# Altium PCB Mechalino_First_Layer.PcbDoc
Units mm, origin at the board's own origin, x right, y up, seen from the top; angles counter-clockwise.
Board outline 120 x 120 mm, 2 copper layers (Top Layer, Bottom Layer); 29 components, 26 nets, 130 pads, 11 vias.
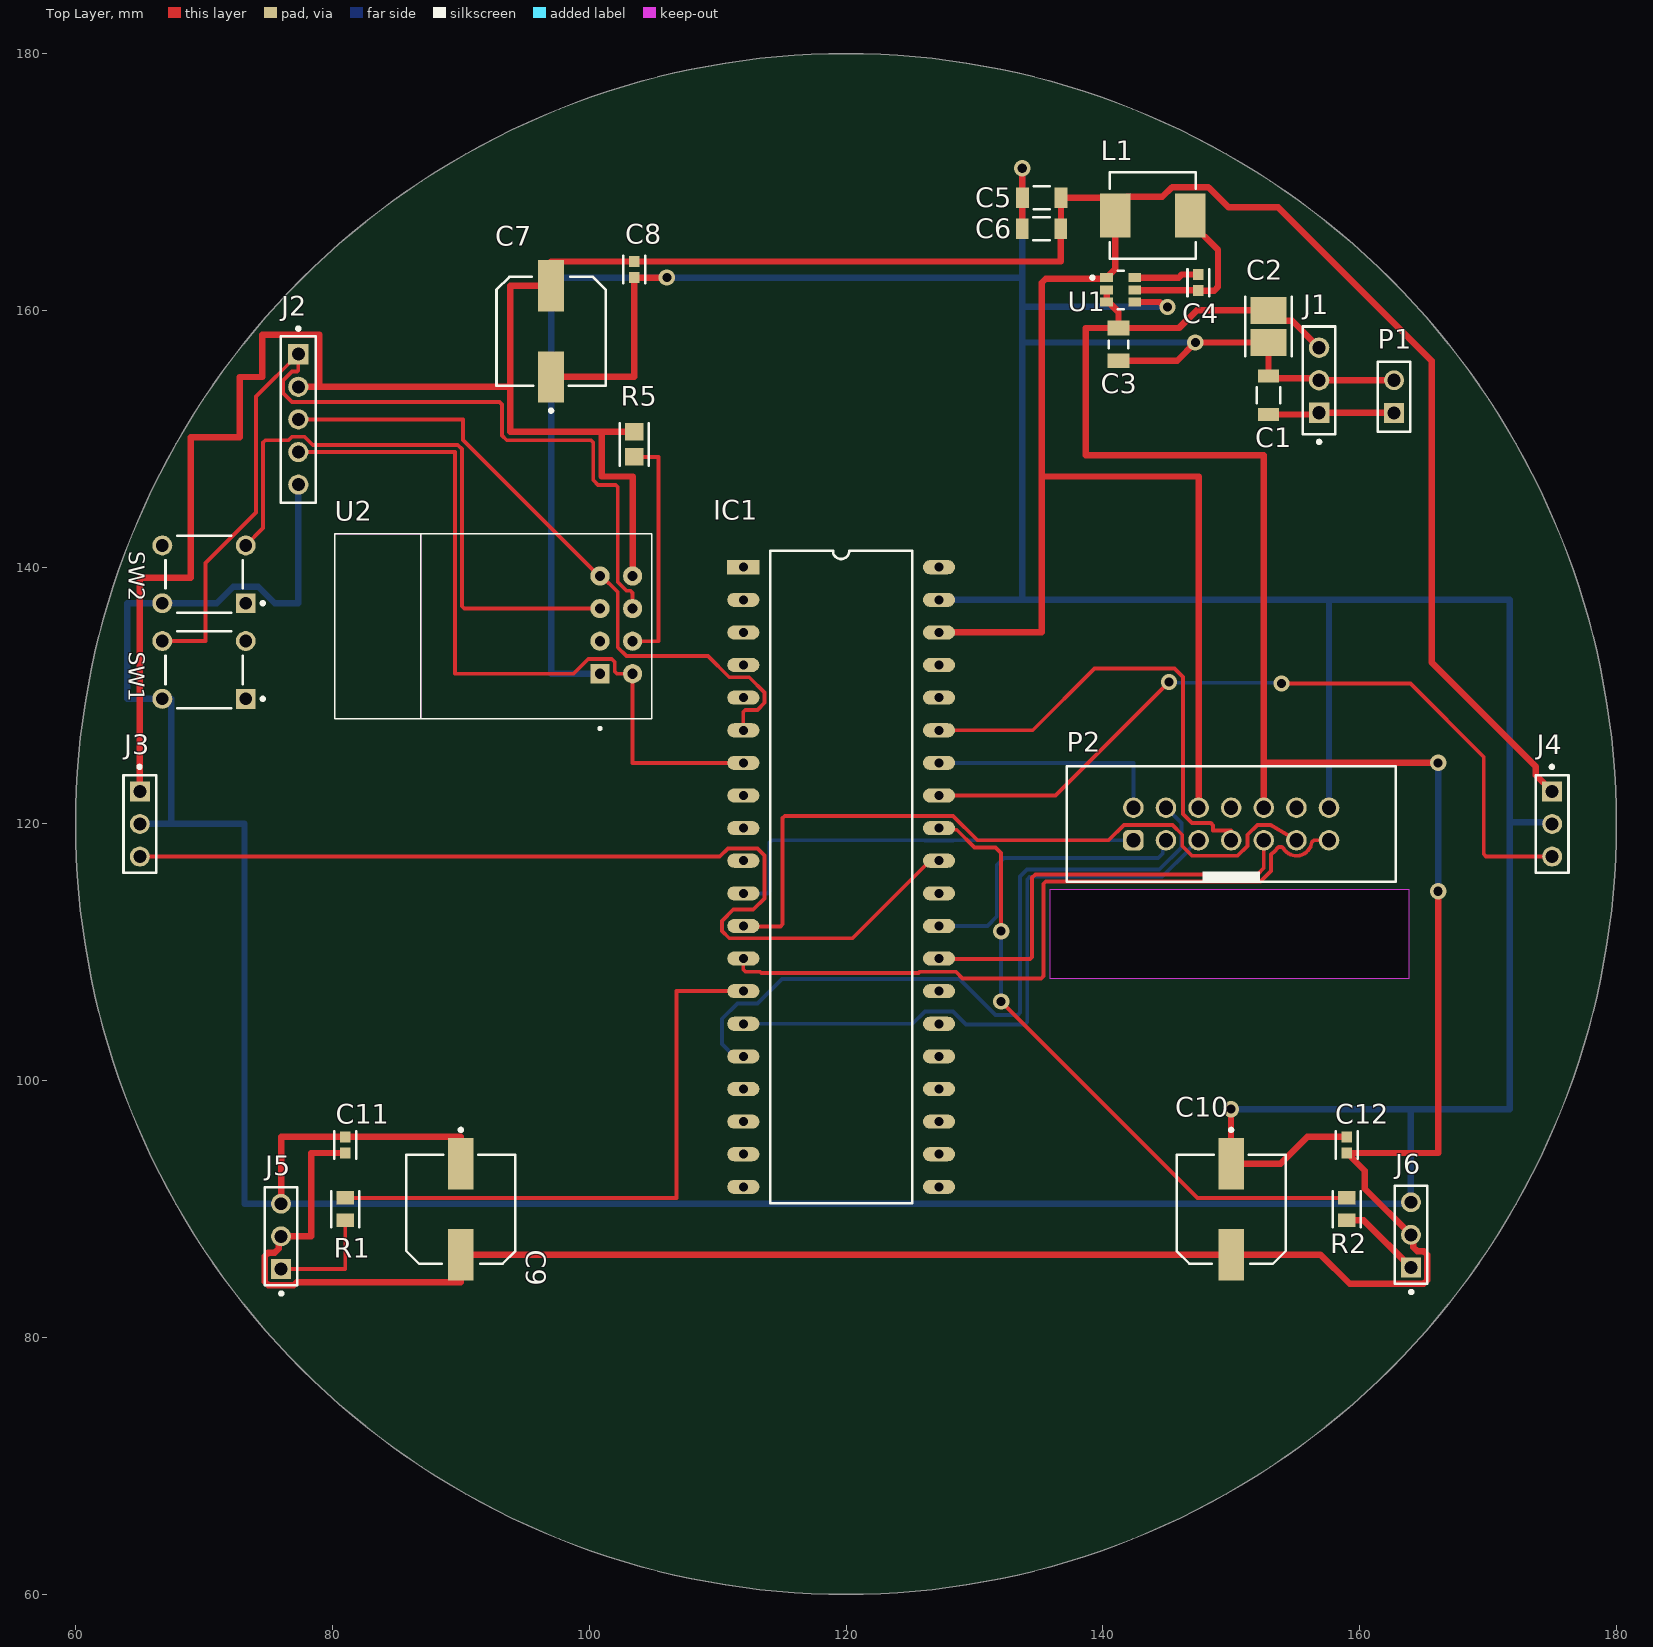
[diagram p0: Top Layer view]
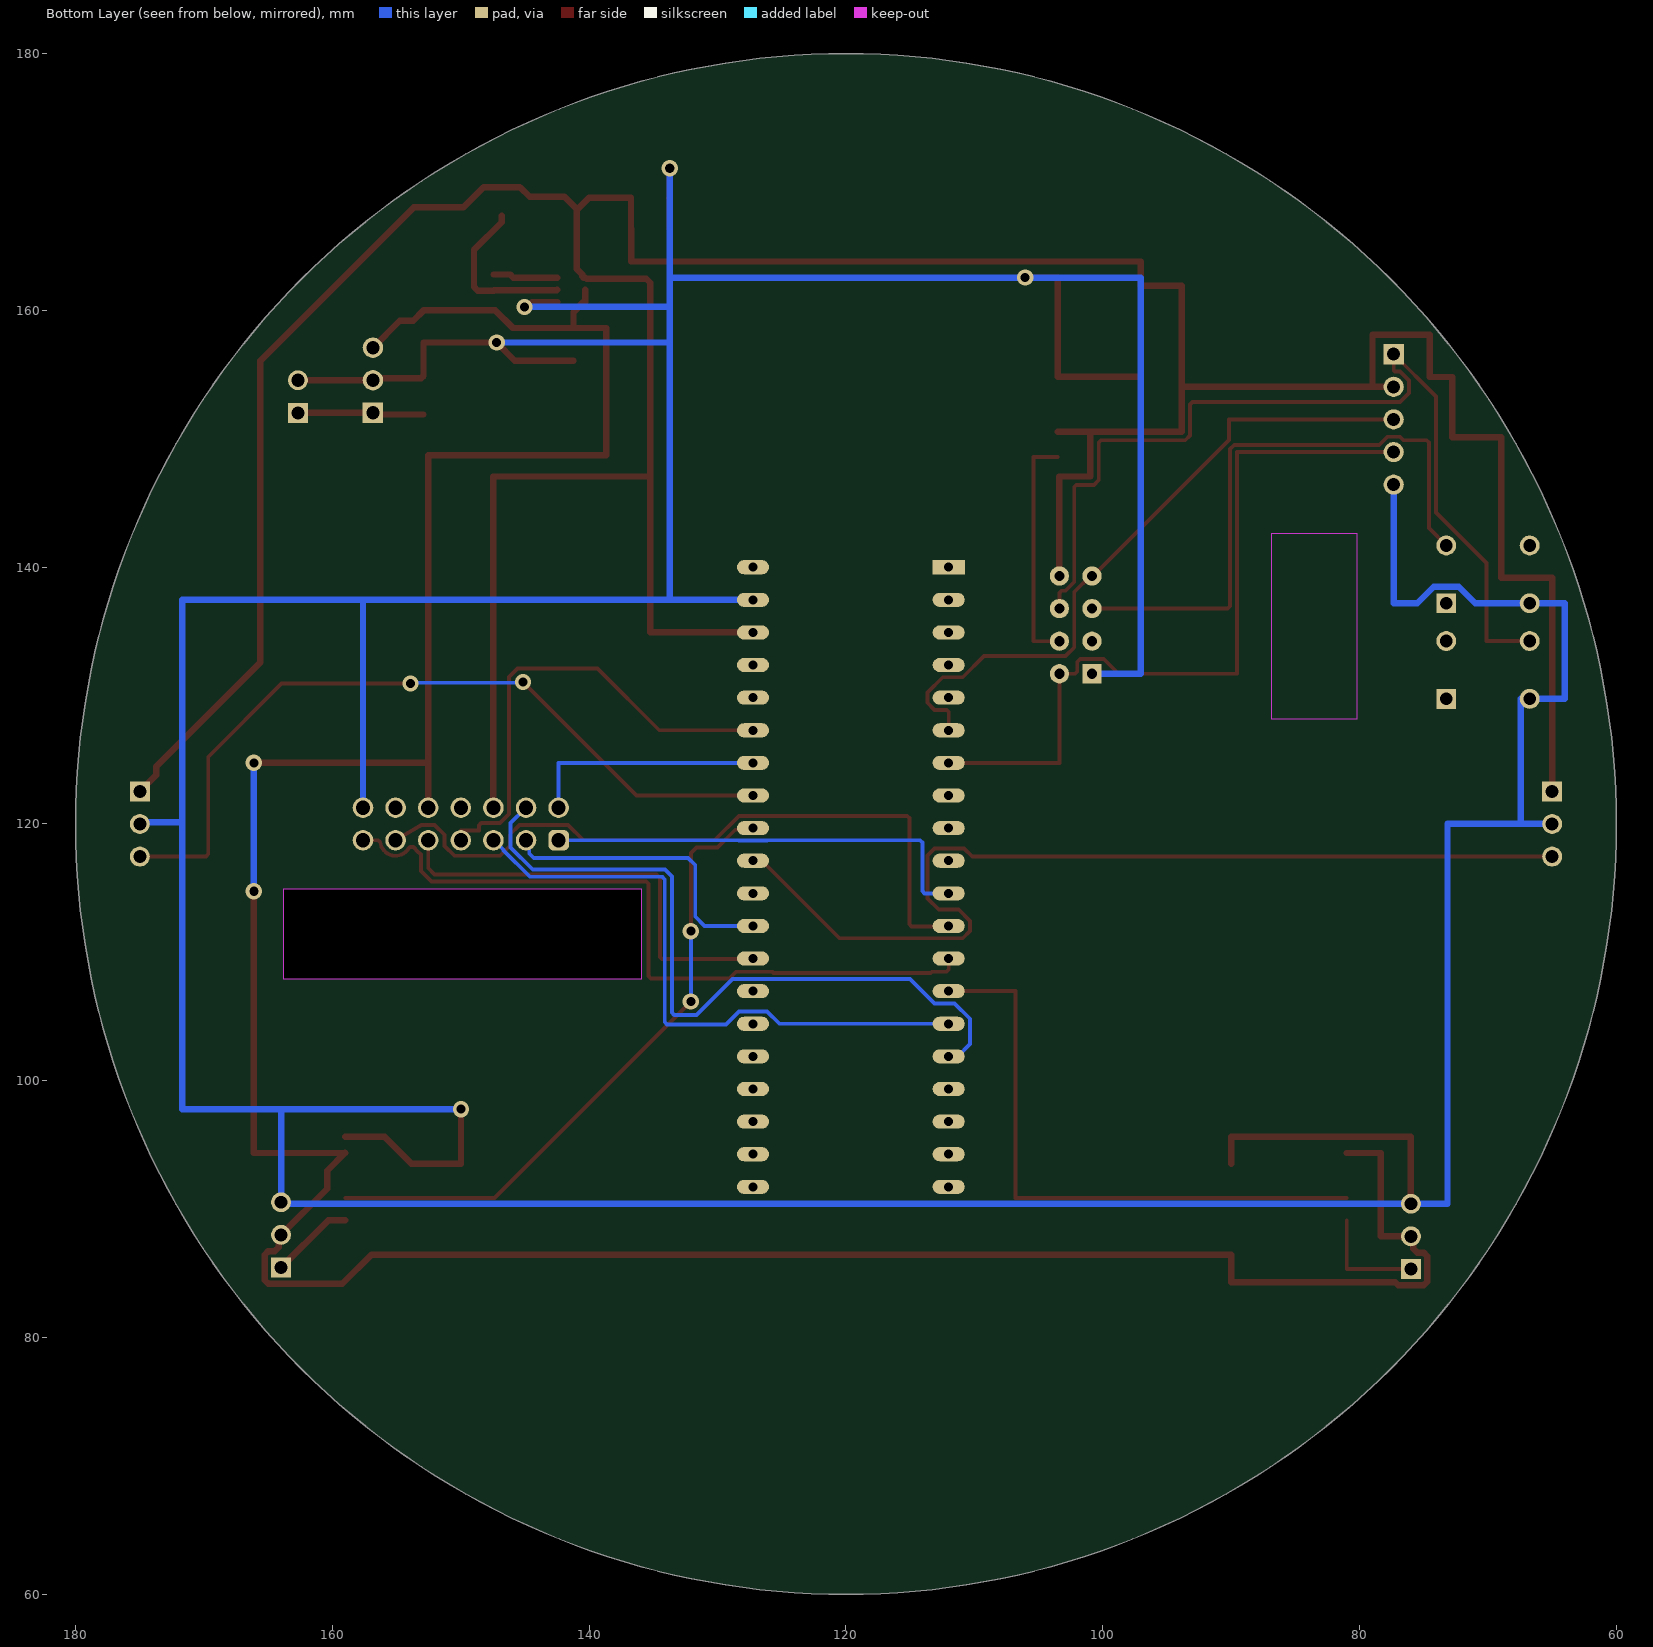
[diagram p1: Bottom Layer view, seen from below]
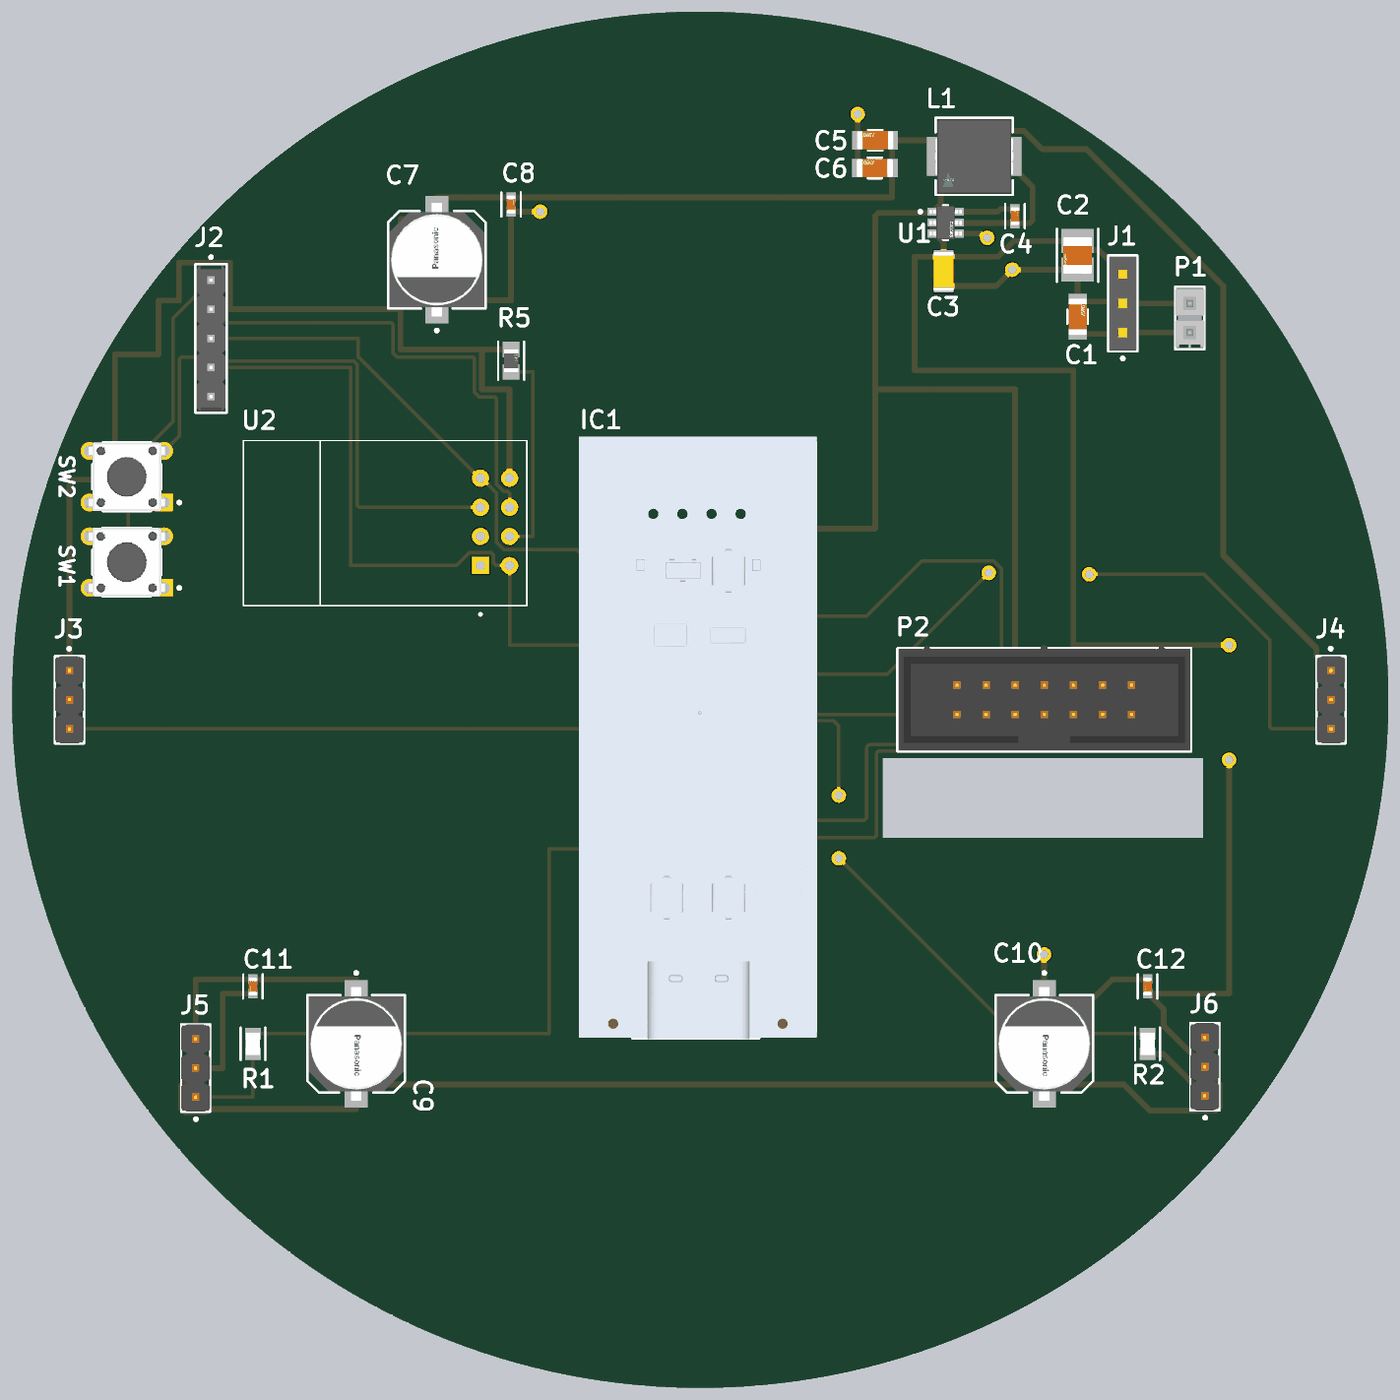
[diagram p2: 3D render of the assembled board from above, using the file's embedded part models]

## Layer stack, top to bottom
Top Solder: solder mask 0.0102, Solder Resist, Dk 3.5
Top Layer: signal copper 0.0356
Dielectric 1: dielectric 0.32, FR-4, Dk 4.8
Bottom Layer: signal copper 0.0356
Bottom Solder: solder mask 0.0102, Solder Resist, Dk 3.5

## Board outline
120,60 cw(c120,120) 60,120 cw(c120,120) 120,180 cw(c120,120) 180,120 cw(c120,120)
cut-out: 135.89,114.935 163.83,114.935 163.83,107.95 135.89,107.95

## Design rules (kind name [scope] priority, off if disabled: settings)
Clearance [All] p1: gap=0.254 ignorepadtopadclearanceinfootprint=TRUE
MinimumSolderMaskSliver [All] p1: minsoldermaskwidth=0.25
PolygonConnect [All] p1: connectstyle=Relief reliefconductorwidth=0.254 reliefentries=4 polygonreliefangle="90 Angle" airgapwidth=0.254
RoutingVias [All] p1: holewidth=0.711 width=1.27 viastyle="Through Hole" minholewidth=0.711 minwidth=1.27 maxholewidth=0.711 maxwidth=1.27
SolderMaskExpansion [All] p1: expansion=0.102 istentingtop=FALSE soldermaskfromhole=TRUE
SupplyNets "Schematic Supply Nets_3" [InNet('BAT+')] p1: voltage=0.000
SupplyNets "Schematic Supply Nets_2" [InNet('+3.3V')] p2: voltage=0.000
SupplyNets "Schematic Supply Nets_1" [InNet('BOOST+')] p3: voltage=0.000
SupplyNets "Schematic Supply Nets" [InNet('GND')] p4: voltage=0.000
Width [All] p1: maxlimit=0.5 minlimit=0.254 preferedwidth=0.3 minimp=50.000000 maximp=50.000000 favimp=50.000000
29 further rules are at their usual default settings.

## Components (designator, comment, footprint, x,y, rotation, side; value= is the part's Value field where it differs from the comment)
C1 "1206ZC226KAT2A" FP-1206Q-MFG 152.908,153.392 r90 top
C2 "GRM32ER71A476KE15L" FP-GRM32E-0_3-0_2-IPC_A 152.908,158.75 r270 top
C3 "GRM31CR71A106KA01L" CAPC3216X180X55LL20T25 141.224,157.353 r90 top
C4 "GCJ188R71H104KA12D" FP-GCJ188-0_2-IPC_C 147.447,162.169 r90 top
C5 "1206ZC226KAT2A" FP-1206Q-MFG 135.255,168.783 r180 top
C6 "1206ZC226KAT2A" FP-1206Q-MFG 135.231,166.37 r180 top
C7 "EEE-FP1E331AP" FP-FPF-MFG 97.028,158.369 r90 top
C8 "GCJ188R71H104KA12D" FP-GCJ188-0_2-IPC_C 103.505,163.185 r90 top
C9 "EEE-FP1E331AP" FP-FPF-MFG 90,90 r270 top
C10 "EEE-FP1E331AP" FP-FPF-MFG 150,90 r270 top
C11 "GCJ188R71H104KA12D" FP-GCJ188-0_2-IPC_C 81,95 r270 top
C12 "GCJ188R71H104KA12D" FP-GCJ188-0_2-IPC_C 159,95 r270 top
IC1 "Black_Pill" Black_Pill_STM32F401CCU6 112,140 r0 top
J1 "Boost" FP-SSW-103-01-G-S-MFG 156.845,154.559 r90 top
J2 "22-28-4050" FP-22-28-4050-MFG 77.343,151.511 r270 top
J3 "90120-0763" FP-90120-0763-MFG 65,120 r270 top
J4 "90120-0763" FP-90120-0763-MFG 175,120 r270 top
J5 "90120-0763" FP-90120-0763-MFG 76,87.884 r90 top
J6 "90120-0763" FP-90120-0763-MFG 164,88 r90 top
L1 "IHLP2525CZER4R7M01" FP-IHLP-2525CZ-FP_2_413x3-MFG 143.891,167.386 r180 top
P1 "TSW-102-26-G-S" SMTC-TSW-102-26-XX-S 162.687,152.019 r90 top
P2 "61201421621" 61201421621 150,120 r0 top
R1 "CR0805-JW-331ELF" FP-CR0805-IPC_B 81,90 r90 top
R2 "CR0805-JW-331ELF" FP-CR0805-IPC_B 159.004,90 r90 top
R5 "RMCF0805JT10K0" FP-RMCF0805-IPC_A 103.505,149.566 r90 top
SW1 "MJTP1230A" FP-MJTP1230A-MFG 70,132 r180 top
SW2 "MJTP1230A" FP-MJTP1230A-MFG 70,139.446 r180 top
U1 "AP63203WU-7" FP-TSOT26-MFG 141.395,161.605 r0 top
U2 "ESP8266-01/ESP-01" XCVR_ESP8266-01/ESP-01 92.528,135.509 r90 top

## Footprints (in the part's own frame and the unit in brackets; to place one, negate y for a bottom-side part, rotate by r counter-clockwise, add the part's x,y. Pads: shape width x height; smd on the part's side, far side on the other; paste and mask are expansions set on the pad)
61201421621 [mm] "14 pins, straight, gold plating"
  rrect50% 1.6x1.6 hole 1.1: 1(-7.62,-1.27)
  round 1.6 hole 1.1: 2(-7.62,1.27) 3(-5.08,-1.27) 4(-5.08,1.27) 5(-2.54,-1.27) 6(-2.54,1.27) 7(0,-1.27) 8(0,1.27) 9(2.54,-1.27) 10(2.54,1.27) 11(5.08,-1.27) 12(5.08,1.27) 13(7.62,-1.27) 14(7.62,1.27)
  silkscreen extent -12.82,-4.5 12.82,4.5, body extent -12.72,-4.42 12.72,4.75, height 9.13
Black_Pill_STM32F401CCU6 [mm]
  rect 2.5x1.1 hole 0.7: 1(0,0)
  oval 2.5x1.1 hole 0.7: 2(0,-2.54) 3(0,-5.08) 4(0,-7.62) 5(0,-10.16) 6(0,-12.7) 7(0,-15.24) 8(0,-17.78) 9(0,-20.32) 10(0,-22.86) 11(0,-25.4) 12(0,-27.94) 13(0,-30.48) 14(0,-33.02) 15(0,-35.56) 16(0,-38.1) 17(0,-40.64) 18(0,-43.18) 19(0,-45.72) 20(0,-48.26) 21(15.24,-48.26) 22(15.24,-45.72) 23(15.24,-43.18) 24(15.24,-40.64) 25(15.24,-38.1) 26(15.24,-35.56) 27(15.24,-33.02) 28(15.24,-30.48) 29(15.24,-27.94) 30(15.24,-25.4) 31(15.24,-22.86) 32(15.24,-20.32) 33(15.24,-17.78) 34(15.24,-15.24) 35(15.24,-12.7) 36(15.24,-10.16) 37(15.24,-7.62) 38(15.24,-5.08) 39(15.24,-2.54) 40(15.24,0)
  silkscreen extent 2.08,-49.53 13.16,1.27, body extent -2.6,-49.61 18.18,2.93, height 11.46
CAPC3216X180X55LL20T25 [mm] "Chip Capacitor, 2-Leads, Body 3.4x1.8mm, IPC High Density"
  rect 1.15x1.7 smd: 1(-1.275,0) 2(1.275,0)
  silkscreen extent -0.3,-0.75 0.3,0.75, body extent -1.7,-0.9 1.7,0.9, height 1.8
FP-22-28-4050-MFG [mm]
  rect 1.57x1.57 hole 1.02 paste-2539.97 mask+0: 1(-5.08,0)
  round 1.57 hole 1.02 paste-2539.97 mask+0: 2(-2.54,0) 3(0,0) 4(2.54,0) 5(5.08,0)
  silkscreen extent -7.2,-1.37 6.48,1.37, body extent -6.58,-1.47 6.58,1.47, height 0.25
FP-1206Q-MFG [mm]
  rect 1x1.6 smd paste+0 mask+0: 1(-1.5,0) 2(1.5,0)
  silkscreen extent -0.63,-0.9 0.63,0.9, body extent -2.1,-1 2.1,1, height 0.25
FP-90120-0763-MFG [mm]
  rect 1.55x1.55 hole 1 paste-2539.97 mask+0: 1(-2.54,0)
  round 1.55 hole 1 paste-2539.97 mask+0: 2(0,0) 3(2.54,0)
  silkscreen extent -4.57,-1.27 3.81,1.27, body extent -3.91,-1.37 3.91,1.37, height 0.25
FP-CR0805-IPC_B [mm]
  rect 1.058x1.362 smd paste+0 mask+0: 1(-0.877,0) 2(0.877,0)
  silkscreen extent -1.41,-1.08 1.41,1.08, body extent -1.66,-0.93 1.66,0.93, height 0.25
FP-FPF-MFG [mm]
  rect 4x2 smd paste+0 mask+0: 1(-3.55,0) 2(3.55,0)
  silkscreen extent -6.3,-4.25 4.25,4.25, body extent -5.8,-4.5 5.8,4.5, height 0.25
FP-GCJ188-0_2-IPC_C [mm]
  rect 0.855x0.812 smd paste+0 mask+0: 1(-0.625,0) 2(0.625,0)
  silkscreen extent -1.05,-0.85 1.05,0.85, body extent -1.15,-0.55 1.15,0.55, height 0.25
FP-GRM32E-0_3-0_2-IPC_A [mm]
  rect 2.103x2.806 smd paste+0 mask+0: 1(-1.251,0) 2(1.251,0)
  silkscreen extent -2.3,-1.8 2.3,1.8, body extent -2.8,-1.9 2.8,1.9, height 0.25
FP-IHLP-2525CZ-FP_2_413x3-MFG [mil]
  rect 95x135 smd paste+0 mask+0: 1(-115,0) 2(115,0)
  silkscreen extent -132,-132 132,132, body extent -166,-136 166,136, height 10
FP-MJTP1230A-MFG [mm]
  rect 1.55x1.55 hole 1 paste-2539.97 mask+0: 1(-3.25,2.25)
  round 1.55 hole 1 paste-2539.97 mask+0: 2(3.25,2.25) 3(-3.25,-2.25) 4(3.25,-2.25)
  silkscreen extent -4.7,-3 3,3, body extent -4.13,-3.13 4.13,3.13, height 0.25
FP-RMCF0805-IPC_A [mm]
  rect 1.355x1.462 smd paste+0 mask+0: 1(-0.976,0) 2(0.976,0)
  silkscreen extent -1.65,-1.13 1.65,1.13, body extent -2.15,-1.23 2.15,1.23, height 0.25
FP-SSW-103-01-G-S-MFG [mm]
  rect 1.59x1.59 hole 1.04 paste-2539.97 mask+0: 1(-2.54,0)
  round 1.59 hole 1.04 paste-2539.97 mask+0: 2(0,0) 3(2.54,0)
  silkscreen extent -4.92,-1.27 4.19,1.27, body extent -4.29,-1.37 4.29,1.37, height 0.25
FP-TSOT26-MFG [mm]
  rect 1x0.7 smd paste+0 mask+0: 1(-1.099,0.95) 2(-1.099,0) 3(-1.099,-0.95) 4(1.099,-0.95) 5(1.099,0) 6(1.099,0.95)
  silkscreen extent -2.32,-1.5 0.22,1.5, body extent -1.7,-1.6 1.7,1.6, height 0.25
SMTC-TSW-102-26-XX-S [mm] ".025 SQ Post Terminal Strip Assembly, 1x2 Pins, Vertical, 2.54mm Pitch, Male"
  rect 1.55x1.55 hole 1.02: 1(0,0)
  round 1.55 hole 1.02: 2(2.54,0)
  silkscreen extent -1.46,-1.27 4,1.27, body extent -1.4,-1.27 3.81,1.27, height 8.38
XCVR_ESP8266-01/ESP-01 [mm]
  rect 1.5x1.5 hole 0.8: 1(-3.81,-8.31)
  round 1.5 hole 0.8: 2(-1.27,-8.31) 3(1.27,-8.31) 4(3.81,-8.31) 5(-3.81,-10.85) 6(-1.27,-10.85) 7(1.27,-10.85) 8(3.81,-10.85)
  Keep-Out Layer region: 7.09,5.65 -7.31,5.65 -7.31,12.35 7.09,12.35
  silkscreen extent -8.16,-12.35 7.09,12.35

## Part data
C1 C5 C6: library part CMP-04427-000069-1, "CAP CER 22UF 10V X7R 1206", Capacitance=22uF, Case Code (Imperial)=1206, Case Code (Metric)=3216, Dielectric=X7R, Max Operating Temperature=125°C, Min Operating Temperature=-55°C, Package Quantity=2500, Tolerance=10%, Voltage=10V, Case/Package=1206, Construction=Flat, Contact Plating=Tin, Depth=1.6mm, Dissipation Factor=5%, Lead Free="Lead Free", Length=3.2mm, Mount="Surface Mount", Packaging="Cut Tape", REACH SVHC="No SVHC", RoHS Compliant=Yes, Series=-, Termination=SMD/SMT, Thickness=0.071inch, Voltage Rating=10V, Voltage Rating (DC)=10V, Width=0.063inch
C2: library part CMP-1662-00023-3, "Chip Multilayer Ceramic Capacitors for General Purpose, 1210, 47uF, X7R, 15%, 10%, 10V", Capacitance=47uF, Case Code (Imperial)=1210, Case Code (Metric)=3225, Dielectric=X7R, Max Operating Temperature=125°C, Min Operating Temperature=-55°C, Package Quantity=1, Tolerance=10%, Voltage=10V, Case/Package=1210, Depth=2.5mm, Height=2.5mm, Lead Free="Lead Free", Length=3.2mm, Material=Ceramic, Mount="Surface Mount", Number of Pins=2, Packaging="Tape and Reel", Radiation Hardening=No, REACH SVHC="No SVHC", Termination=SMD/SMT, Thickness=0.106inch, Voltage Rating=10V, Voltage Rating (DC)=10V, Width=2.5mm
C3: library part CMP-2000-06349-1, "Chip Monolithic Ceramic Capacitor, 10 uF, 10 V, +/- 10%, -55 to 125 degC, 1206 (3216 Metric), RoHS, Tape and Reel", Capacitance=10µF, Manufacturer=Murata, Operating Temperature=-55°C~125°C, Package / Case=1206(3216Metric), Package Description="2-Pin Surface Mount Device, Body 3.2 x 1.6 mm", Package Reference=1206, Ratings=-, Standard Package=1, Temperature Coefficient=X7R, Tolerance=±10%, Voltage - Rated=10V, Applications=GeneralPurpose, Catalog Drawings=GRMSeries_1206_1.6, Category=Capacitors, Datasheet URL=http://search.murata.co.jp/Ceramy/image/img/A01X/G101/ENG/GRM31CR71A106KA01-01.pdf, Datasheet Version=02/2016, Family=CeramicCapacitors, Featured Product=GA3SafetyRecognizedCapsandHi-CapMLCC, Features=-, Height - Seated (Max)=-, Lead Spacing=-, Lead Style=-, Manufacturer URL=http://www.murata.com/, Mounting Technology=SurfaceMount, Mounting Type=SurfaceMount,MLCC, Online Catalog=GRMSeries, Other Names=490-3371-6, Packaging=Digi-Reel®, Product Training Modules=High-CapMultilayerCeramicCapacitors, Series=GRM, Size / Dimension="0.126\"Lx0.063\"W(3.20mmx1.60mm)", Thickness (Max)="0.071\"(1.80mm)"
C4 C8 C11 C12: library part CMP-2006-02223-2, "Cap Ceramic 0.1uF 50V X7R 10% Pad SMD 0603 Soft Termination +125°C Automotive T/R", Capacitance=100nF, Case Code (Imperial)=0603, Case Code (Metric)=1608, Dielectric=X7R, Max Operating Temperature=125°C, Min Operating Temperature=-55°C, Package Quantity=1, Ratings=AEC-Q200, Tolerance=10%, Voltage Rating=50V, Case/Package=0603, Depth=0.8mm, Features="Soft Termination", Height=0.8mm, Lead Free="Lead Free", Length=1.6mm, Mount="Surface Mount", Packaging="Tape and Reel", Radiation Hardening=No, Termination=SMD/SMT, Thickness=0.035inch, Voltage Rating (DC)=50V, Width=0.031inch
C7 C9 C10: library part CMP-05427-000082-1, "CAP ALUM 330UF 20% 25V SMD", Capacitance=330uF, Case/Package=Radial, Dielectric Material=Aluminium, ESR (Equivalent Series Resistance)=80mR, Leakage Current=82.5uA, Max Operating Temperature=105°C, Min Operating Temperature=-55°C, Package Quantity=500, Ripple Current=850mA, Tolerance=20%, Voltage=25V, Construction=Cylindrical, Contact Plating=Tin, Diameter=8mm, Height=10.2mm, Height - Seated (Max)=0.402inch, Lead Free="Lead Free", Lead Pitch=3.1mm, Length=10.5mm, Life (Hours)=2000Hour, Material=Aluminium, Mount="Surface Mount", Number of Pins=2, Packaging="Tape and Reel", Radiation Hardening=No, REACH SVHC="No SVHC", Ripple Current (AC)=850mA, RoHS Compliant=Yes, Series=FP, Termination=SMD/SMT, Voltage Rating=25V, Voltage Rating (DC)=25V, Width=8.3mm
IC1: "STM32F401CCU6"
J1: library part CMP-00575-00296058-1, "SSW-103-01-G-S SSW - Samtec 2.54mm Single Row Straight Socket Strip 8.5 Profile (mcv)(TO22)", Color=Black, Contact Resistance=10mΩ, Current Rating=4.7A, Manufacturer Lifecycle Status=PRODUCTION, Max Current Rating=6.9A, Max Operating Temperature=125°C, Max Voltage Rating (AC)=550V, Min Operating Temperature=-55°C, Voltage Rating=655V, Voltage Rating (AC)=465V, Connector Type="Receptacle, Socket", Contact Material="Gold, Nickel", Contact Plating=Gold, Depth=2.41mm, Gender=Receptacle, Height=8.64mm, Housing Color=Black, Lead Free="Lead Free", Lead Length=2.64mm, Lead Pitch=2.54mm, Length=8.13mm, Lifecycle Status=Production, Mount="Through Hole", Number of Contacts=3, Number of Positions=3, Number of Rows=1, Orientation=Straight, Pitch=2.54mm, Radiation Hardening=No, REACH SVHC="No SVHC", RoHS=Compliant, Termination=Solder, Voltage Rating (DC)=655V
J2: library part CMP-00257-00278173-1, "22-28-4050 KK® 254 Breakaway Header, Vertical, 5 Circuits, Tin (Sn) Plating, Mating Pin Length 6.09mm", Color=Black, Contact Resistance=20mΩ, Current Rating=4A, Flammability Rating="UL94 V-0", Max Operating Temperature=75°C, Max Voltage Rating (DC)=250.25kV, Min Operating Temperature=0°C, Voltage Rating=250V, Connector Type="Male Pin", Contact Material=Brass, Contact Mating Length=6.096mm, Contact Plating=Tin, Gender=Male, Glow Wire Compliant=Non-compliant, Height=2.29mm, Housing Color=Black, Housing Material=Thermoplastic, Lead Free="Lead Free", Lead Pitch=2.54mm, Length=12.7mm, Mount="Through Hole", NexarPartId=278173, Number of Circuits=5, Number of Contacts=5, Number of Positions=5, Number of Rows=1, Orientation=Vertical, Packaging=Bulk, Pitch=2.54mm, Radiation Hardening=No, REACH SVHC=Unknown, RoHS=Compliant, Schedule B=8536694040, Termination=Solder, Voltage Rating (DC)=250V, Width=2.49mm
J3 J4 J5 J6: library part CMP-04776-000084-1, "CONN HEADER VERT 3POS 2.54MM", Current Rating=3A, Manufacturer=Molex, Temperature="-55°C to +125°C", Temperature Range High=+125°C, Temperature Range Low=-55°C, Voltage Rating=350V, Automotive=No, Category=Conn, ComponentLink2Description=Datasheet, ComponentLink2URL=https://www.molex.com/webdocs/datasheets/pdf/en-us/0901200763_PCB_HEADERS.pdf, Conn Gender=Male, Conn Orientation=Vertical, Contact Material=Gold,Nickel, Device Class L1=Connectors, Device Class L2="Headers and Wire Housings", Device Class L3=unset, Digikey Description="CONN HEADER VERT 3POS 2.54MM", Footprint Url=https://www.molex.com/pdm_docs/sd/901200763_sd.pdf, Height=5.8mm, Lead Free=Yes, Manufacturer Part Number=90120-0763, Mouser Description="Board-To-Board Connector, C-Grid III 90120 Series, Through Hole, Header, 3, 2.54 mm", Number of Contacts=3, Number of Rows=1, Octopart=https://octopart.com/90120-0763-molex-655433, Package=90120-0763, Pitch=2.54mm, RoHS=TRUE
L1: library part CMP-02424-000538-1, "Commercial Inductors, High Saturation Series 4.7uH 5.5A 40mΩ 20%", Case Code (Imperial)=2525, Case Code (Metric)=6363, Current Rating=5.5A, DC Resistance (DCR)=40mR, Inductance=4.7uH, Inductance Tolerance=20%, Max DC Current=10A, Max Operating Temperature=125°C, Min Operating Temperature=-55°C, Package Quantity=2000, Self Resonant Frequency=5MHz, Test Frequency=100kHz, Case/Package=2525, Contact Plating=Tin, Core Material=Metal, Depth=6.72mm, Height=3mm, Height - Seated (Max)=0.118inch, Lead Free="Lead Free", Length=7.24mm, Military Standard=Not, Mount="Surface Mount", Number of Pins=2, Packaging="Tape and Reel", Radiation Hardening=No, RMS Current (Irms)=5.5A, Saturation Current=10A, Shielding=Shielded, Termination=SMD/SMT, Tolerance=20%, Width=0.255inch
P1: library part CMP-1024-00327-1, "0.025\" SQ Post Header, Through-hole, Vertical, -55 to 125 degC, 2.54 mm Pitch, 2-Pin, Male, RoHS", Manufacturer=Samtec, Temperature Range="-55 to 125 degC", ComponentLink1Description="Manufacturer URL", ComponentLink1URL=http://www.samtec.com, ComponentLink2Description=Datasheet, ComponentLink2URL=http://www.samtec.com/documents/webfiles/pdf/TSW_TH.PDF, ComponentLink3Description="Package Specification", ComponentLink3URL=http://www.samtec.com/documents/webfiles/cpdf/TSW-XXX-XX-XXX-X-XX-XXX-MKT.pdf, DatasheetVersion=F-214, Mounting Technology=Through-hole, Orientation=Vertical, PackageDescription=".025[0.64] SQ. Post Terminal Strip Assembly", PackageReference=TSW-102-26-XX-S, PackageVersion="DM, 8/1988", PartNumber=TSW-102-26-G-S, Pitch="2.54 mm", RoHS=True
P2: library part CMP-1502-00008-2, Color=Black, Contact Resistance=20mΩ, Current Rating=3A, Insulation Resistance=1GΩ, Max Operating Temperature=105°C, Min Operating Temperature=-40°C, Operating Supply Voltage=250V, Connector Type="Male Pin", Contact Material=Copper, Contact Plating=Gold, Gender=Male, Height=9.25mm, Insulation Material=PBT, Lead Pitch=2.54mm, Length=25.44mm, Mount="Through Hole", NexarPartId=26603596, Number of Contacts=14, Number of Pins=14, Number of Positions=14, Number of Rows=2, Orientation=Vertical, Pitch=2.54mm, REACH SVHC=Unknown, RoHS=Compliant, Row Spacing=2.54mm, Termination=Solder, Voltage Rating=250V
R1 R2: library part CMP-07231-005909-1, "Thick Film Chip Resistors 0805 330Ω 0.125W 5% 200ppm/°C", Case Code (Imperial)=0805, Case Code (Metric)=2012, Max Operating Temperature=155°C, Max Power Dissipation=125mW, Min Operating Temperature=-55°C, Package Quantity=1, Resistance=330R, Temperature Coefficient=200ppm/°C, Tolerance=5%, Voltage Rating=150V, Case/Package=0805, Composition="Thick Film", Contact Plating=Tin, Depth=1.25mm, Features="Moisture Resistant", Height=0.024inch, Length=2mm, Military Standard=Not, Mount="Surface Mount", Number of Pins=2, Number of Terminations=2, Packaging="Tape and Reel", Power Rating=125mW, Radiation Hardening=No, REACH SVHC="No SVHC", Termination=SMD/SMT, Thickness=508um, Voltage Rating (DC)=150V, Width=0.049inch
R5: library part CMP-26527-002663-1, "10kΩ ±5% 0.125W 0805 Thick Film Chip Resistor AEC-Q200 compliant", Case Code (Imperial)=0805, Case Code (Metric)=2012, Max Operating Temperature=155°C, Max Power Dissipation=125mW, Min Operating Temperature=-55°C, Resistance=10kR, Resistor Type="Thick Film", Temperature Coefficient=100ppm/°C, Tolerance=5%, Case/Package=0805, Construction=Rectangular, Contact Plating=Tin, Depth=1.25mm, Features="Automotive AEC-Q200", Height=0.026inch, Lead Free="Lead Free", Length=2mm, Military Standard=Not, Mount="Surface Mount", Number of Terminations=2, Packaging="Tape and Reel", Power Rating=125mW, Radiation Hardening=No, RoHS Compliant=Yes, Series=RMCF, Size Code=0805, Width=0.049inch
SW1 SW2: library part CMP-47024-000004-1, "SWITCH TACTILE SPST-NO 0.05A 12V", Actuator Color=Black, Contact Resistance=100mR, Current Rating=50mA, Max Operating Temperature=70°C, Max Voltage Rating (DC)=12V, Min Operating Temperature=-20°C, Operating Force=160gf, Package Quantity=2000, Actuator Length=1.4mm, Actuator Material=Thermoplastic, Actuator Type=Standard, Color=Black, Contact Material=Bronze, Contact Plating=Silver, Electrical Life=100000Cycles, Illumination Type=Non-Illuminated, Mechanical Life=100000Cycles, Mount="Through Hole", Orientation=Straight, Packaging=Bulk, REACH SVHC="No SVHC", RoHS Compliant=Yes, Series=MJTP, Switch Function=Off-Mom, Switch Travel=0.25mm, Termination="PC Pin", Throw Configuration=SPST, Voltage Rating (DC)=12V
U1: library part CMP-12757-000006-1, "IC REG BUCK 3.3V 2A TSOT26", Ambient Temperature Range High=+85°C, Ambient Temperature Range Low=-40°C, Manufacturer="Diodes Inc.", Max Junction Temp=+160°C, Max Supply Voltage=32V, Min Supply Voltage=3.8V, Nominal Supply Current=22uA, Output Current=2A, Output Voltage=3.3V, Package=TSOT26, Switching Frequency=1.1MHz, Temperature="to +160°C", Automotive=No, Category=IC, ComponentLink2Description=Datasheet, ComponentLink2URL=https://www.diodes.com/assets/Datasheets/AP63200-AP63201-AP63203-AP63205.pdf, Device Class L1="Integrated Circuits (ICs)", Device Class L2="Power Management ICs", Device Class L3="Voltage Regulators - Switching", Digikey Description="IC REG BUCK 3.3V 2A TSOT26", Footprint Url=https://www.diodes.com/assets/Package-Files/TSOT26.pdf, Height=1mm, Lead Free=Yes, Manufacturer Part Number=AP63203WU-7, Mouser Description="AP63203 Series 3.3 V 2 A SMT Fixed Low IQ Synchronous Buck - TSOT-26", Number Of Outputs=1, Octopart=https://octopart.com/ap63203wu-7-diodes+inc.-98099550, Output Type=Fixed, RoHS=TRUE, Standoff Height=0.01mm, Switching Topology=Buck, Temperature Range High=+160°C
U2: "MakerFocus 4pcs ESP8266 ESP-01 Serial Wireless WiFi Transceiver Receiver Module 1MB SPI Flash DC3.0-3.6V Internet of Things WiFi Module Board Compatible with Ar duino", Package=None, Availability=Unavailable, MP=ESP8266-01/ESP-01, Price=None

## Via types
v1: diameter 1.27, hole 0.711, Top Layer to Bottom Layer, 11 vias

## Nets (pads, with @x,y where several pads share a name; then routed paths per layer and width w, separated by ;. In a path a pad name is that pad's centre, name@x,y a point inside that pad or via, vN(x,y) a via of type N, cw(c..) or ccw(c..) an arc to the next point about the centre after c; other vN are vias at no path point)
+3.3V: C5.1 C6.1 C7.2 C8.2 IC1.38 J2.2 J3.1 J4.1 L1.2 P2.6 R5.2 U1.1 U2.8 | length 311.7
  Top Layer w0.5: J3.1 65,139.192 68.961,139.192 68.961,150.114 72.771,150.114 72.771,154.813 74.549,154.813 74.549,158.115 78.994,158.115 78.994,154.051 ; J2.2 78.994,154.051 ; U2.8 103.378,147.066 100.965,147.066 100.965,150.542 ; R5.2 100.965,150.542 ; IC1.38 135.255,134.92 135.255,147.066 ; U1.1 140.199,162.459 135.548,162.459 135.255,162.166 135.255,147.066 ; U1.1@140.298,162.555 140.445,162.555 140.545,162.655 140.545,162.802 140.97,163.227 L1.2 L1.2@140.97,167.826 ; P2.6 147.46,147.066 135.255,147.066 ; J4.1 173.736,123.804 173.736,124.46 165.608,132.588 165.608,156.083 153.67,168.021 149.811,168.021 148.227,169.604 145.397,169.604 144.643,168.851 141.927,168.851 140.97,167.894 L1.2@140.97,167.826 ; 78.994,154.051 93.853,154.051 ; 93.853,154.051 93.853,150.542 100.965,150.542 ; 93.853,154.051 93.853,161.919 C7.2 97.028,163.811 C8.2 136.731,163.811 C6.1 136.743,166.382 136.743,168.771 C5.1 140.013,168.783 L1.2@140.97,167.826
A2: IC1.28 P2.9 | length 34.1
  Top Layer w0.3: IC1.28 127.24,109.474 134.317,109.474 134.493,109.65 134.493,115.824 134.747,116.078 152.045,116.078 152.54,116.573 P2.9
A3: IC1.29 P2.3 | length 23.2
  Bottom Layer w0.3: IC1.29 131.015,112.06 131.744,112.789 131.744,116.796 132.3,117.352 144.318,117.352 144.671,117.706 144.671,118.481 P2.3
A5: IC1.31 J3.3 | length 76.9
  Top Layer w0.3: J3.3 110.17,117.46 110.804,118.094 113.095,118.094 113.654,117.535 113.654,114.205 112.779,113.33 111.221,113.33 110.346,112.455 110.346,111.665 110.905,111.106 120.506,111.106 126.54,117.14 IC1.31
A6: IC1.32 R2.2 | length 50.5
  Top Layer w0.3: IC1.32 127.364,119.556 128.63,119.556 130.01,118.176 131.65,118.176 132.08,117.746 v1(132.08,111.656) ; v1(132.08,106.172) 147.375,90.877 R2.2
  Bottom Layer w0.3: v1(132.08,106.172) v1(132.08,111.656)
A7: IC1.33 J4.3 | length 61.5
  Top Layer w0.3: IC1.33 136.317,122.22 v1(145.161,131.064) ; v1(153.924,130.937) 163.957,130.937 169.672,125.222 169.672,117.651 169.848,117.475 174.985,117.475 J4.3
  Bottom Layer w0.3: v1(145.161,131.064) 145.225,131 153.861,131 v1(153.924,130.937)
A9: IC1.6 J2.3 U2.4 | length 52.7
  Top Layer w0.3: J2.3 90.17,151.511 90.17,149.903 100.754,139.319 100.963,139.319 102.224,138.058 102.224,133.761 102.9,133.085 109.246,133.085 110.905,131.426 112.463,131.426 113.654,130.235 113.654,129.445 113.095,128.886 112.176,128.886 112,128.71 IC1.6
A10: IC1.7 J2.4 U2.5 | length 60.3
  Top Layer w0.3: J2.4 89.535,148.971 89.535,131.699 98.767,131.699 99.921,132.853 101.755,132.853 101.992,132.616 101.992,131.875 102.168,131.699 U2.5 103.378,124.76 IC1.7
B0: IC1.34 P2.2 | length 18.6
  Bottom Layer w0.3: IC1.34 142.38,124.76 P2.2
B1: IC1.35 P2.7 | length 37.2
  Top Layer w0.3: IC1.35 134.549,127.3 139.352,132.103 145.591,132.103 146.256,131.438 146.256,120.771 146.961,120.066 148.414,120.066 148.59,119.89 148.59,119.507 150,119.507 P2.7
B3: IC1.11 P2.1 | length 34.3
  Bottom Layer w0.3: IC1.11 113.877,114.6 114.053,114.776 114.053,118.554 114.229,118.73 126.141,118.73 126.145,118.726 128.335,118.726 128.339,118.73 P2.1
B4: IC1.12 P2.11 | length 56.2
  Top Layer w0.3: IC1.12 112,112.014 114.886,112.014 115.062,112.19 115.062,120.458 115.238,120.634 128.335,120.634 130.239,118.73 140.443,118.73 141.647,119.934 145.419,119.934 146.19,119.163 146.19,118.297 146.961,117.526 150.499,117.526 151.27,118.297 151.27,119.163 152.041,119.934 153.039,119.934 P2.11
B5: IC1.13 P2.13 | length 56.9
  Top Layer w0.3: IC1.13 112,108.664 112.176,108.488 113.325,108.488 113.418,108.395 125.64,108.395 125.733,108.488 128.565,108.488 129.08,107.973 135.206,107.973 135.382,108.149 135.382,115.348 135.558,115.524 152.274,115.524 153.094,116.344 153.094,117.616 153.182,117.704 ; 153.182,117.704 153.202,117.725 ccw(c152.54,118.73) 153.557,118.086 cw(c153.81,117.924) 154.063,118.086 ccw(c155.08,118.73) 156.274,118.574 156.341,118.642 ; 156.342,118.642 156.43,118.73 P2.13
B6: IC1.14 R1.2 | length 47.1
  Top Layer w0.3: R1.2 106.807,90.877 106.807,106.98 IC1.14
B7: IC1.15 P2.5 | length 48.7
  Bottom Layer w0.3: IC1.15 125.191,104.44 126.145,105.394 128.335,105.394 129.335,104.394 133.936,104.394 134.112,104.57 134.112,115.688 134.321,115.897 144.627,115.897 146.678,117.948 146.678,117.993 147.415,118.73 P2.5
B8: IC1.16 P2.4 | length 57.5
  Bottom Layer w0.3: IC1.16 111.3,101.9 110.346,102.854 110.346,104.835 111.537,106.026 113.095,106.026 115.003,107.934 128.849,107.934 131.65,105.133 133.382,105.133 133.558,105.309 133.558,115.918 134.092,116.451 144.398,116.451 146.124,118.177 146.124,120.066 P2.4
BAT+: C1.1 J1.1 P1.1 | length 9.8
  Top Layer w0.5: C1.1 156.718,151.892 J1.1 P1.1
BOOST+: C2.1 C3.2 C9.2 C10.2 C11.2 C12.2 J1.3 J5.2 J6.2 P2.10 U1.2 U1.3 | length 248.2
  Top Layer w0.5: C11.2 78.359,94.375 78.359,87.884 J5.2 75.811,87.695 75.811,86.916 75.519,86.623 75.016,86.623 74.721,86.328 74.721,84.36 75.016,84.065 76.984,84.065 77.222,84.303 90,84.303 C9.2 C10.2 156.955,86.45 159.224,84.181 164.984,84.181 165.279,84.476 165.279,86.444 164.984,86.739 164.481,86.739 164.189,87.032 164.189,87.811 J6.2 160.413,91.587 160.413,92.998 C12.2@159.018,94.393 ; U1.3 U1.2 ; U1.3@140.445,160.655 141.224,159.876 C3.2 ; P2.10 152.54,124.761 ; J1.3 154.745,159.199 153.709,159.199 C2.1 147.313,160.001 145.941,158.628 C3.2 ; C12.2 166.116,94.375 v1(166.116,114.761) ; v1(166.116,124.761) 152.54,124.761 ; C3.2 138.684,158.628 138.684,148.717 152.54,148.717 152.54,124.761
  Bottom Layer w0.5: v1(166.116,114.761) v1(166.116,124.761)
GND: C1.2 C2.2 C3.1 C5.2 C6.2 C7.1 C8.1 C9.1 C10.1 C11.1 C12.1 IC1.39 J1.2 J2.5 J3.2 J4.2 J5.3 J6.3 P1.2 P2.14 SW1.2 SW2.2 U1.4 U2.1 | length 519.9
  Top Layer w0.5: J5.3 76,95.625 C11.1 90,95.625 C9.1 ; C7.1 103.505,154.819 C8.1 v1(106.045,162.56) ; C6.2 133.743,166.382 133.743,168.771 C5.2 ; C6.2@133.731,166.67 C6.2@133.743,166.682 ; v1(133.731,171.069) 133.743,171.057 133.743,168.783 133.731,168.771 C5.2@133.743,168.759 ; C3.1 145.791,156.078 v1(147.212,157.499) C2.2 C1.2 153.074,154.725 156.679,154.725 J1.2 P1.2 ; U1.4 144.445,160.655 144.826,160.274 v1(145.034,160.274) ; v1(149.987,97.79) 149.987,93.55 C10.1 153.848,93.55 155.924,95.625 C12.1
  Bottom Layer w0.5: J3.2 65,120.015 73.152,120.015 73.152,90.424 J5.3 164,90.424 J6.3 164,97.79 ; 67.437,120.142 67.437,129.75 SW1.2 64.008,129.75 64.008,137.196 SW2.2 70.987,137.196 72.266,138.475 74.234,138.475 75.513,137.196 77.343,137.196 J2.5 ; U2.1 97.028,131.699 97.028,162.56 v1(106.045,162.56) 133.731,162.56 ; IC1.39 133.731,137.46 ; v1(133.731,171.069) 133.731,162.56 ; v1(145.034,160.274) 133.731,160.274 ; v1(147.212,157.499) 133.731,157.499 ; v1(149.987,97.79) 164,97.79 ; P2.14 157.62,137.46 157.48,137.46 ; J4.2 175,120.142 171.704,120.142 ; 133.731,137.46 133.731,157.499 ; 133.731,137.46 157.48,137.46 ; 133.731,157.499 133.731,160.274 ; 133.731,160.274 133.731,162.56 ; 157.48,137.46 171.704,137.46 171.704,120.142 ; 164,97.79 171.704,97.79 171.704,120.142
NetC4_1: C4.1 L1.1 U1.5 | length 13.1
  Top Layer w0.5: U1.5 142.525,161.575 147.416,161.575 C4.1 148.678,161.544 148.971,161.837 148.971,164.719 146.812,166.878 L1.1
NetC4_2: C4.2 U1.6 | length 5.1
  Top Layer w0.5: U1.6 145.918,162.555 146.158,162.795 C4.2
NetJ5_1: J5.1 R1.1 | length 8.8
  Top Layer w0.3: J5.1 81,85.344 R1.1
NetJ6_1: J6.1 R2.1 | length 6.5
  Top Layer w0.5: R2.1 160.337,89.123 J6.1
NetR5_1: R5.1 U2.6 | length 18.3
  Top Layer w0.3: U2.6 105.41,134.239 105.41,148.59 R5.1
NetSW2_3: SW2.3 U2.3 | length 47.7
  Top Layer w0.3: SW2.3 74.595,143.041 74.595,149.714 74.771,149.889 76.58,149.889 76.851,150.16 77.835,150.16 78.47,149.525 89.764,149.525 90.089,149.2 90.089,136.955 90.265,136.779 U2.3
RST: J2.1 SW1.4 U2.7 | length 74.8
  Top Layer w0.3: SW1.4 70.104,134.25 70.104,140.335 74.041,144.272 74.041,153.289 J2.1 77.343,155.321 77.262,155.24 76.851,155.24 76.154,154.543 76.154,153.559 76.851,152.862 93.023,152.862 93.199,152.686 93.199,150.271 93.582,149.888 100.135,149.888 100.311,149.712 100.311,146.795 100.694,146.412 102.048,146.412 102.224,146.236 102.224,138.841 102.9,138.165 103.202,138.165 103.378,137.989 U2.7
pads on no net: IC1.1 IC1.2 IC1.3 IC1.4 IC1.5 IC1.8 IC1.9 IC1.10 IC1.17 IC1.18 IC1.19 IC1.20 IC1.21 IC1.22 IC1.23 IC1.24 IC1.25 IC1.26 IC1.27 IC1.30 IC1.36 IC1.37 IC1.40 P2.8 P2.12 SW1.1 SW1.3 SW2.1 SW2.4 U2.2

## Silkscreen, mask and mechanical layers (free items; w line width, h text height)
Mechanical 1:
  circle w0.254: c120,120 r60